# Altium PCB T-Display SF32 V0.6(1).PcbDoc (part 1 of 2)
Units mil, origin at the board's own origin, x right, y up, seen from the top; angles counter-clockwise.
Board outline 1672.83 x 1680.71 mil, 4 copper layers (Top, GND, POWER, Bottom), stack 35.4 mil thick; 133 components, 115 nets, 507 pads, 349 vias.
Unrouted connection lines stored in the file: 310.
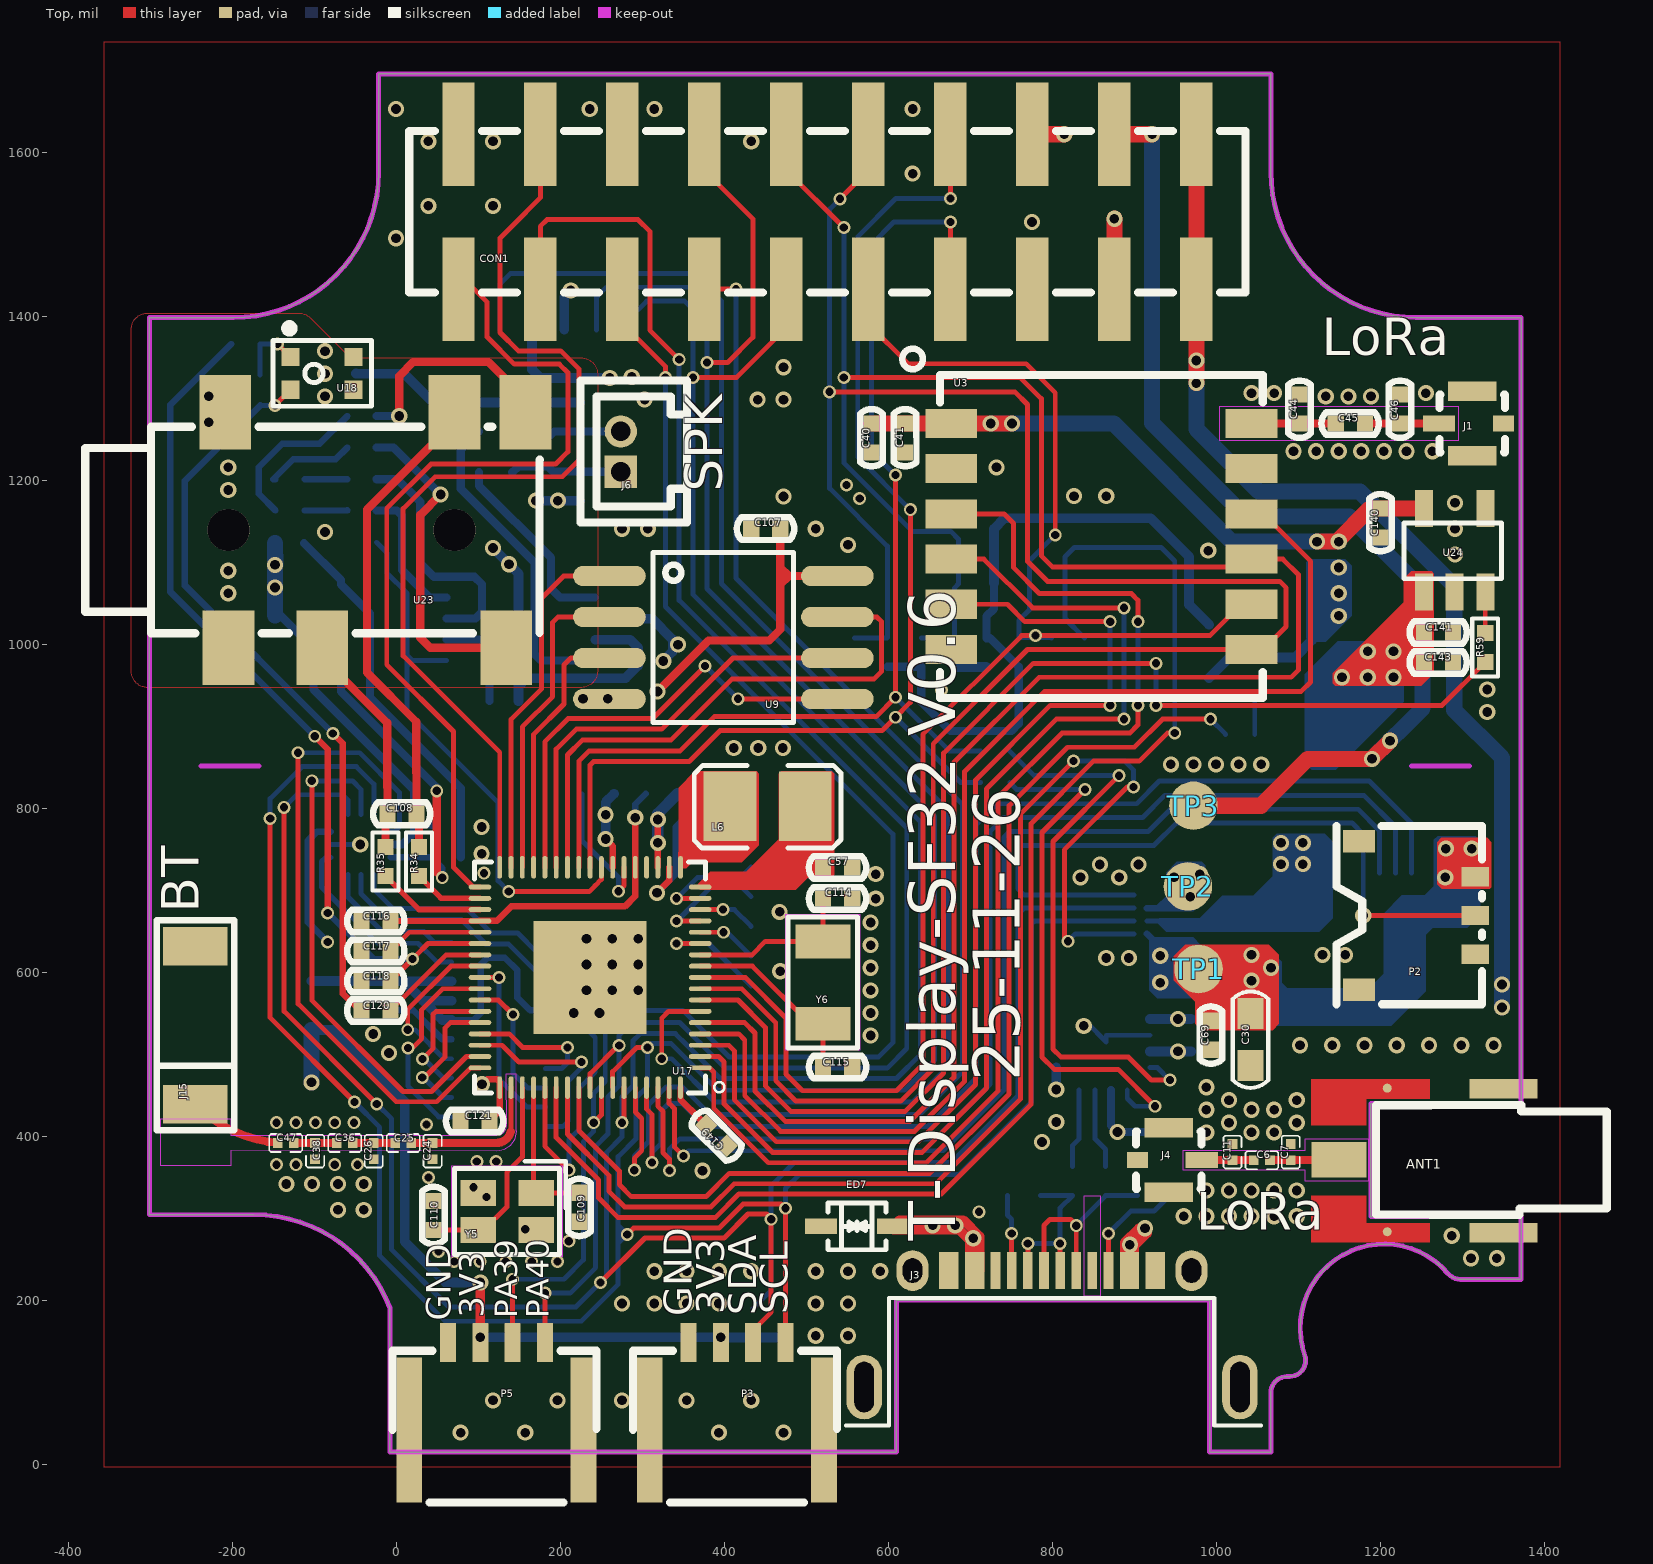
[diagram p0: Top view]
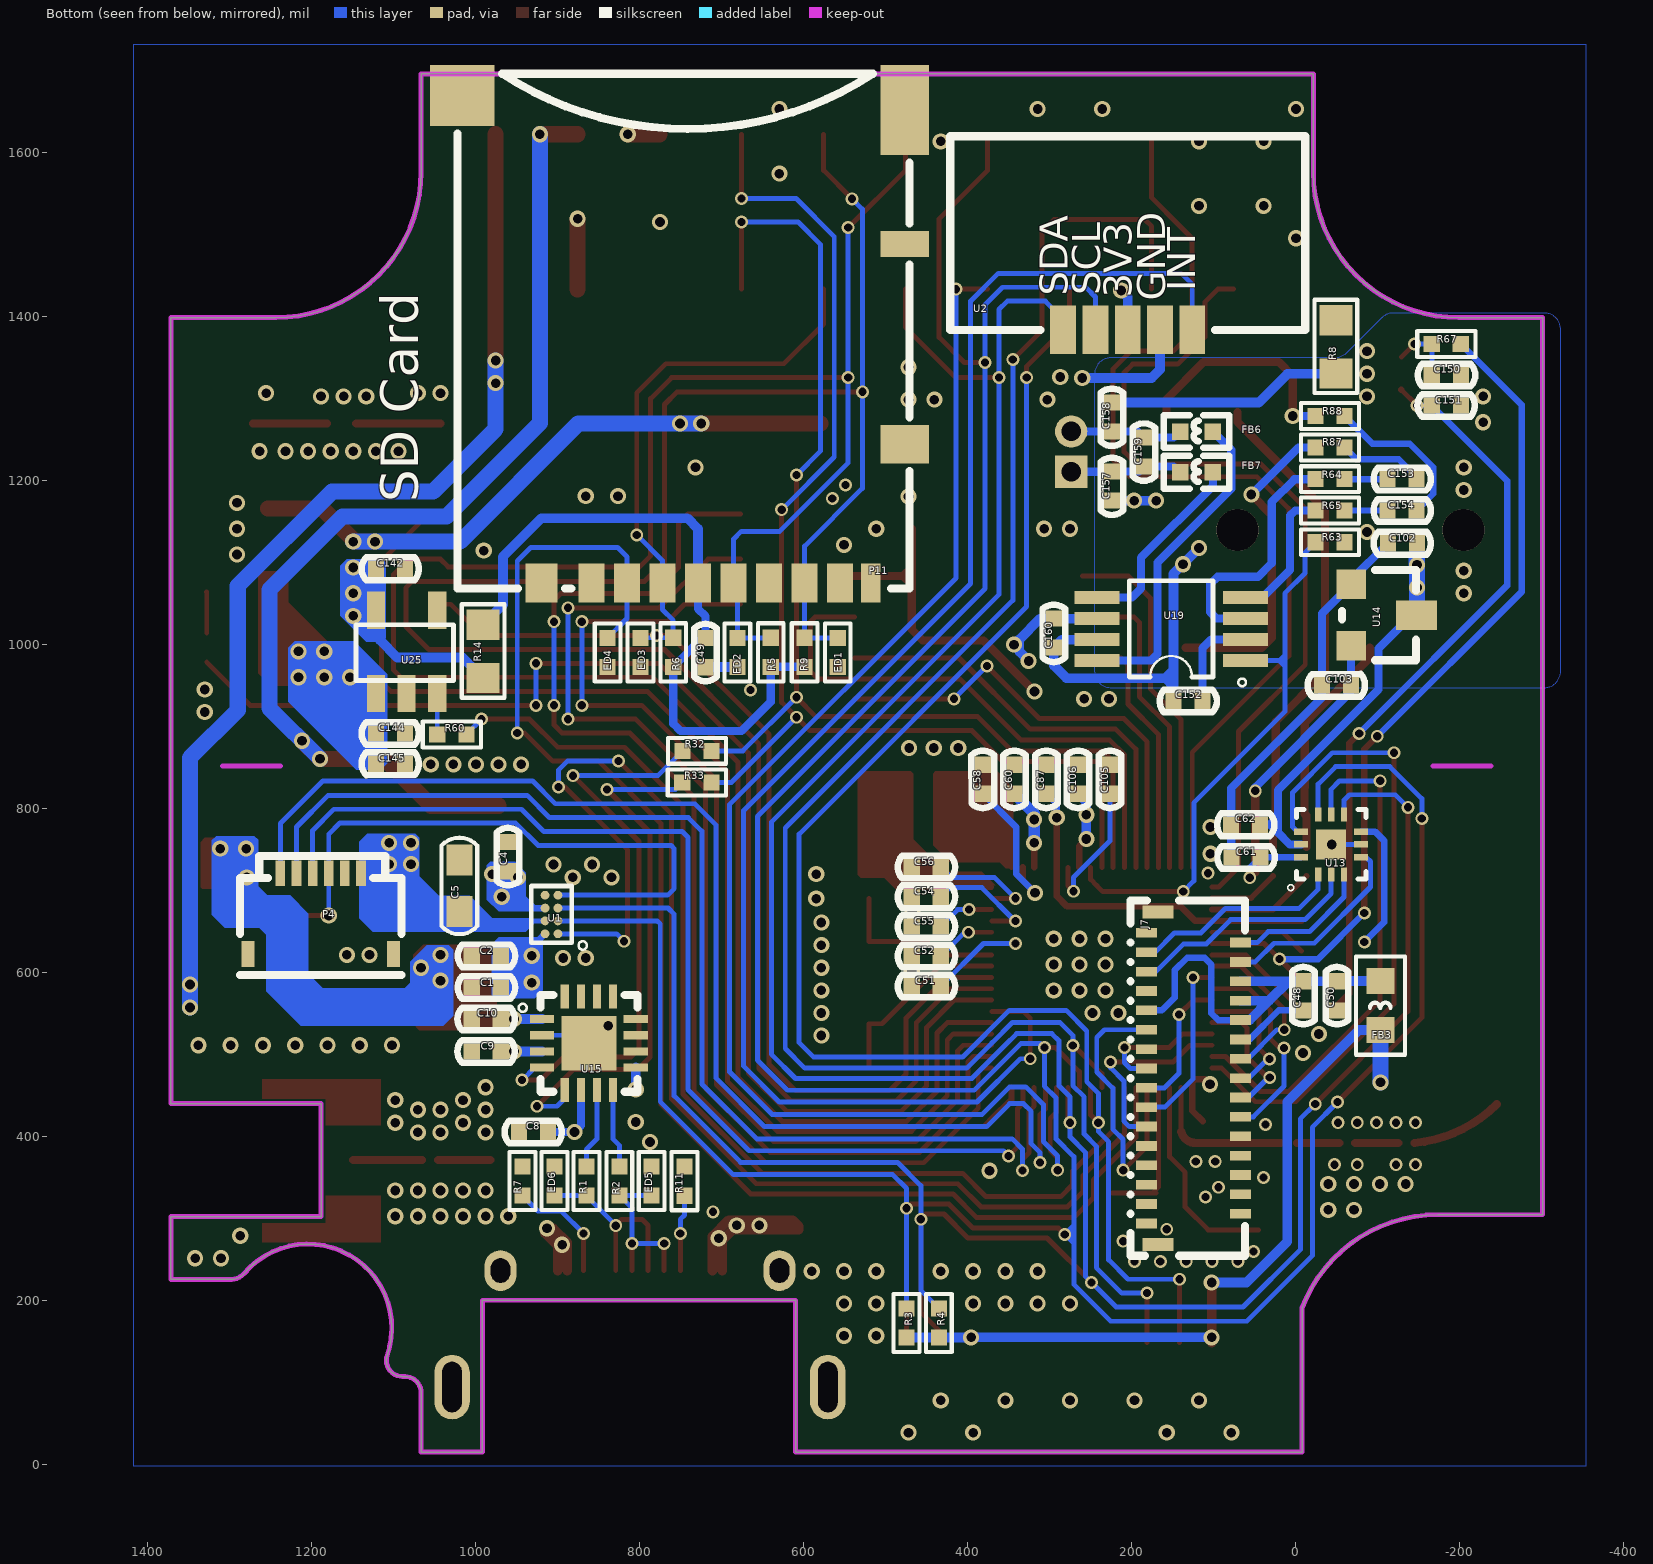
[diagram p1: Bottom view, seen from below]
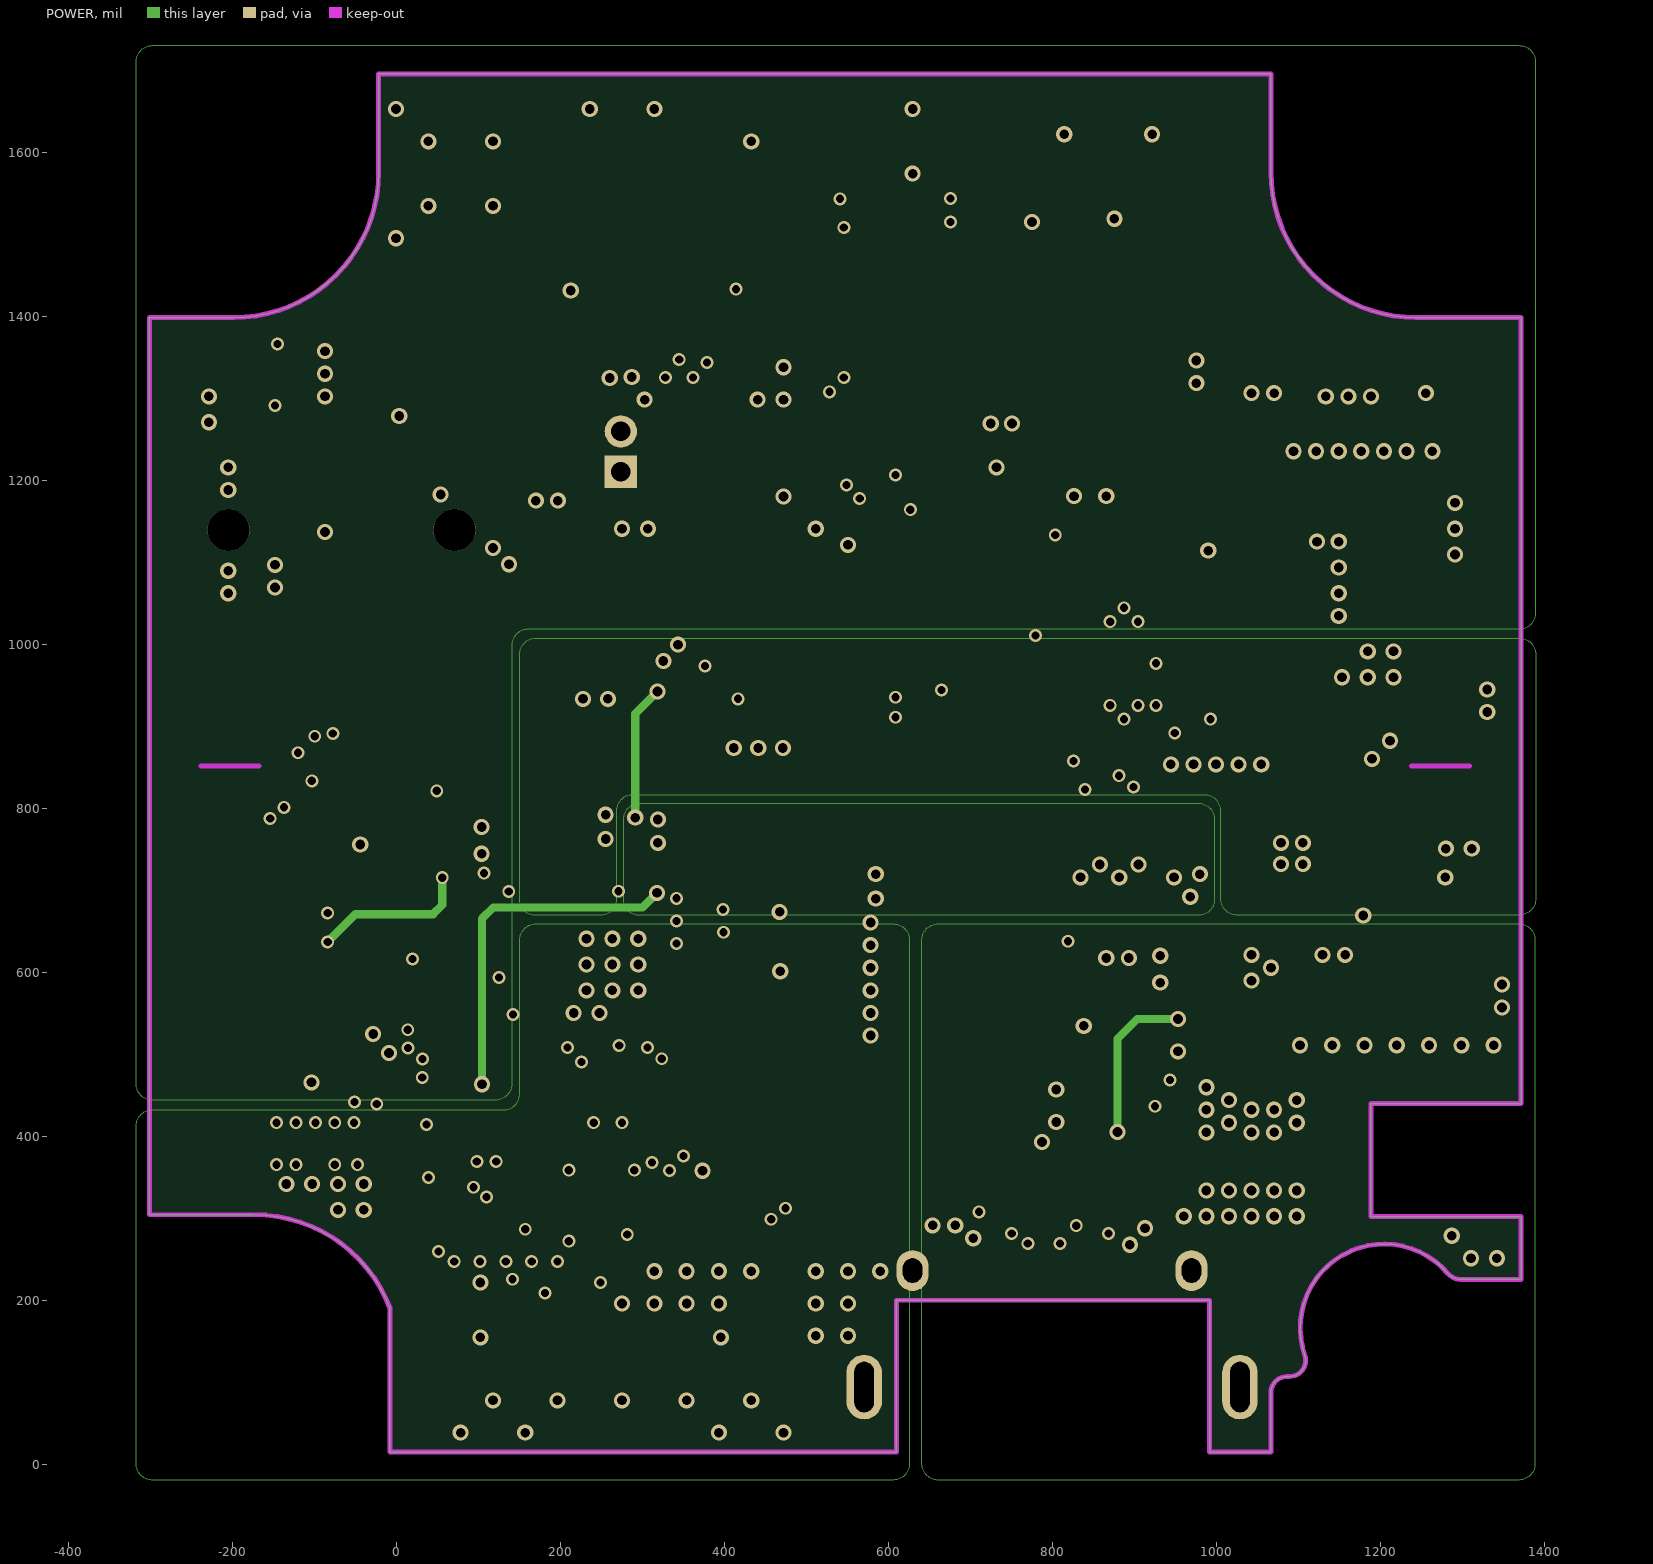
[diagram p2: POWER]

## Layer stack, top to bottom
Solder Mask Top: solder mask 0.4, Solder Resist, Dk 3.5
Top: signal copper 1.35
Dielectric 1: dielectric 10, FR-4, Dk 4.3
GND: signal copper 1.35
Dielectric2: dielectric 10, FR-4, Dk 4.3
POWER: signal copper 1.35
Dielectric3: dielectric 10, FR-4, Dk 4.3
Bottom: signal copper 1.35
Solder Mask Bottom: solder mask 0.4, Solder Resist, Dk 3.5

## Board outline
1372.05,302.91 1372.05,226.34 1298.02,226.34 cw(c1298.02,246.02) 1283.02,233.28 1282.96,233.34 ccw(c1205.01,167) 1108.17,133.82 cw(c1089.55,127.45) 1089.55,107.76 1086.61,107.76 ccw(c1086.61,88.08) 1066.93,88.08 1066.93,15.71 992.13,15.71 992.13,200.75 610.24,200.75 610.24,15.71 -7.48,15.71 -7.48,191.52 -7.44,191.41 ccw(c-172.83,127.91) -172.83,305.08 -300.79,305.08 -300.79,1399.17 -198.43,1399.17 ccw(c-198.43,1576.34) -21.26,1576.34 -21.26,1696.42 1066.93,1696.42 1066.93,1576.34 ccw(c1244.09,1576.34) 1244.09,1399.17 1372.05,1399.17 1372.05,440.71 1188.98,440.71 1188.98,302.91

## Design rules (kind name [scope] priority, off if disabled: settings)
Clearance "Clearance - Default - DEFAULT- SMD" [IsVia vs IsSMTPin] p1: gap=6 ignorepadtopadclearanceinfootprint=FALSE
Clearance "Clearance - Default - DEFAULT - Via" [IsVia vs IsVia] p2: gap=6 ignorepadtopadclearanceinfootprint=FALSE
Clearance "Clearance - Default - DEFAULT - Net" [All] p3: gap=6 ignorepadtopadclearanceinfootprint=FALSE except(0: Arc-Hole Track-Hole SMDPad-Hole THPad-Hole Via-Hole Fill-Hole Poly-Hole Region-Hole Text-Hole; 10: Arc-Fill Arc-Poly Arc-Region Track-Fill Track-Poly Track-Region SMDPad-Fill SMDPad-Poly SMDPad-Region THPad-Fill THPad-Poly THPad-Region Via-Fill Via-Poly Via-Region Fill-Fill Fill-Poly Fill-Region Poly-Poly Poly-Region Region-Region Text-Text)
ComponentClearance "ComponentClearance - Default - DEFAULT" [All] p1: gap=6 collisioncheckmode=3 verticalgap=10 showdistances=FALSE
FanoutControl Fanout_Small [(CompPinCount < 5)] p3: bgadir=Out bgaviamode=Centered fanoutstyle=Auto fanoutdirection=OutThenIn viagrid=1 // Fanout_Small (Default Rule)
FanoutControl Fanout_SOIC [IsSOIC] p4: bgadir=Out bgaviamode=Centered fanoutstyle=Auto fanoutdirection=Alternating viagrid=1 // Fanout_SOIC (Default Rule)
HoleToHoleClearance "HoleToHoleClearance - Default - DEFAULT" [All] p1: gap=6 allowstackedmicrovias=TRUE
Length "Default Length" [All] p1: maxlimit=50000 minlimit=0
MaxMinImpedance "Default Impedance" [All] p1: minimum=50.00 maximum=150.0
ParallelSegment "Default Parallel Segment Adjasent" [All] p1: limit=1000 gap=200
ParallelSegment "Default Parallel Segment Same Layer" [All] p2: limit=1000 gap=200
PlaneConnect "Default PlaneConnect" [All] p1: planeconnectstyle=Direct reliefexpansion=20 reliefentries=4 reliefconductorwidth=15 reliefairgap=10
PolygonConnect "PolygonConnect - Default SMT" [IsSMTPin] p1: connectstyle=Direct reliefconductorwidth=10 reliefentries=4 polygonreliefangle="45 Angle" airgapwidth=10
PolygonConnect "PolygonConnect - Default Pad" [All] p2: connectstyle=Direct reliefconductorwidth=15 reliefentries=4 polygonreliefangle="45 Angle" airgapwidth=10
RoutingLayers "RoutingLayers - Default - DEFAULT" [All] p1: top layer_v5=TRUE mid layer 1_v5=TRUE mid layer 2_v5=TRUE bottom layer_v5=TRUE
RoutingPriority "RoutingPriority - Default - DEFAULT" [All] p1: routingpriority=3
RoutingTopology "Default Routing Topology" [All] p1: topology=Shortest
RoutingVias "RoutingVias - Default - DEFAULT" [All] p1: holewidth=11.81 width=19.68 viastyle="Through Hole" minholewidth=11.81 minwidth=19.68 maxholewidth=11.81 maxwidth=19.68
SMDToCorner "SMDToCorner - Default - DEFAULT" [All] p1: distance=60000
SolderMaskExpansion [All] p1: expansion=4 istentingtop=FALSE
Width "Default Width" [All] p1: maxlimit=118.11 minlimit=6 preferedwidth=6
20 further rules are at their usual default settings.

## Components (designator, comment, footprint, x,y, rotation, side; value= is the part's Value field where it differs from the comment)
ANT1 "SMA-SMD_BWMMCX-JEF" SMA-SMD_BWMMCX-JEF 1250.15,371.41 r180 top
C1 "C0402" C0402 987.4,582.28 r180 bottom
C2 "C0402" C0402 987.4,620.87 r180 bottom
C4 "C0402" C0402 961.02,741.73 r90 bottom
C5 "C0603" C0603 1020.47,706.69 r90 bottom
C6 "C0201" C0201 1055.91,371.65 r0 top
C7 "C0201" C0201 1090.94,381.5 r270 top
C8 "C0402" C0402 929.92,405.91 r0 bottom
C9 "C0402" C0402 987.4,504.33 r0 bottom
C10 "C0402" C0402 987.4,543.7 r0 bottom
C11 "C0201" C0201 1020.08,381.5 r270 top
C24 "C0201" C0201 44.49,382.68 r90 top
C25 "C0201" C0201 8.66,392.52 r0 top
C26 "C0201" C0201 -27.17,382.68 r90 top
C30 "C0603" C0603 1041.73,519.29 r90 top
C36 "C0201" C0201 -62.6,392.52 r0 top
C38 "C0201" C0201 -98.82,382.68 r270 top
C40 "C0402" C0402 579.92,1252.36 r90 top
C41 "C0402" C0402 620.87,1252.36 r90 top
C44 "C0402" C0402 1101.97,1287.8 r270 top
C45 "C0402" C0402 1163.78,1270.08 r180 top
C46 "C0402" C0402 1224.41,1287.8 r270 top
C47 "C0201" C0201 -134.65,392.52 r0 top
C48 "C0402" C0402 -9.06,572.05 r90 bottom
C49 "C0402" C0402 720.08,990.55 r90 bottom
C50 "C0402" C0402 -50,572.05 r90 bottom
C51 "C0402" C0402 450.79,583.86 r180 bottom
C52 "C0402" C0402 450.79,620.47 r180 bottom
C54 "C0402" C0402 450.79,692.91 r180 bottom
C55 "C0402" C0402 450.79,656.69 r180 bottom
C56 "C0402" C0402 450.79,729.13 r180 bottom
C57 "C0402" C0402 538.58,728.35 r180 top
C58 "C0402" C0402 381.89,836.22 r270 bottom
C60 "C0402" C0402 343.31,836.22 r270 bottom
C61 "C0402" C0402 61.02,740.94 r180 bottom
C62 "C0402" C0402 61.42,780.71 r180 bottom
C69 "C0402" C0402 993.7,524.02 r90 top
C87 "C0402" C0402 304.33,836.22 r270 bottom
C102 "C0402" C0402 -129.92,1124.02 r0 bottom
C103 "C0402" C0402 -49.61,950.79 r0 bottom
C105 "C0402" C0402 226.77,836.22 r270 bottom
C106 "C0402" C0402 265.75,836.22 r270 bottom
C107 "C0402" C0402 450.79,1141.73 r180 top
C108 "C0402" C0402 7.09,794.09 r180 top
C109 "C0402" C0402 223.62,314.17 r270 top
C110 "C0402" C0402 45.67,304.33 r270 top
C114 "C0402" C0402 538.58,690.55 r180 top
C115 "C0402" C0402 538.58,485.04 r180 top
C116 "C0402" C0402 -24.41,663.39 r180 top
C117 "C0402" C0402 -24.41,626.77 r180 top
C118 "C0402" C0402 -24.41,590.16 r180 top
C120 "C0402" C0402 -24.41,554.33 r180 top
C121 "C0402" C0402 96.06,419.29 r180 top
C140 "C0402" C0402 1200.39,1148.82 r90 top
C141 "C0402" C0402 1271.26,1015.35 r180 top
C142 "C0402" C0402 1104.33,1092.91 r0 bottom
C143 "C0402" C0402 1271.26,978.74 r180 top
C144 "C0402" C0402 1104.33,892.13 r0 bottom
C145 "C0402" C0402 1104.33,855.12 r0 bottom
C149 "C0402" C0402 390.94,401.57 r135 top
C150 "C0402" C0402 -183.46,1329.13 r180 bottom
C151 "C0402" C0402 -183.46,1292.13 r0 bottom
C152 "C0402" C0402 131.5,931.5 r180 bottom
C153 "C0402" C0402 -129.33,1202.17 r180 bottom
C154 "C0402" C0402 -129.33,1163.98 r180 bottom
C157 "C0402" C0402 224.41,1193.7 r270 bottom
C158 "C0402" C0402 224.41,1277.95 r270 bottom
C159 "C0402" C0402 185.43,1235.43 r270 bottom
C160 "C0402" C0402 295.28,1014.37 r270 bottom
CON1 "HDR-SMD_20P-P2.54-V-F-R2-C10-S2.54-LS7.1" HDR-SMD_20P-P2.54-V-F-R2-C10-S2.54-LS7.1 525.98,1528.35 r180 top
ED1 "R0402" R0402 559.06,990.94 r270 bottom
ED2 "R0402" R0402 681.5,990.94 r270 bottom
ED3 "R0402" R0402 799.61,990.94 r270 bottom
ED4 "R0402" R0402 839.76,990.94 r270 bottom
ED5 "R0402" R0402 785.43,346.06 r90 bottom
ED6 "R0402" R0402 903.94,346.06 r90 bottom
ED7 "SOD-323_L1.8-W1.3-LS2.5-BI" SOD-323_L1.8-W1.3-LS2.5-BI 562.2,290.94 r180 top
FB3 "FB0603" FB0603 -103.15,560.24 r90 bottom
FB6 "FB0402" FB0402 121.26,1260.24 r0 bottom
FB7 "FB0402" FB0402 121.26,1210.63 r0 bottom
J1 "IPEX-SMD_4P-L1.7-W1.7-LS2.0-L" IPEX-SMD_4P-L1.7-W1.7-LS2.0-L 1311.42,1270.08 r0 top
J3 "TYPE-C-MK-TCF" TYPE-C-MK-TCF 629.92,237.01 r0 top
J4 "IPEX-SMD_4P-L1.7-W1.7-LS2.0-L" IPEX-SMD_4P-L1.7-W1.7-LS2.0-L 943.31,371.65 r180 top
J6 "CONN-TH_2P-P1.25_MEGASTAR_ZX-MX1.25-2PZZ" CONN-TH_2P-P1.25_MEGASTAR_ZX-MX1.25-2PZZ 274.02,1235.83 r90 top
J7 "FPC-SMD_P0.30-31P_FGS-XJ-H1.0" FPC-SMD_P0.30-31P_FGS-XJ-H1.0 124.8,471.65 r270 bottom
J15 "CA-C03" CA-C03 -244.88,439.76 r90 top
L6 "L1008" L1008 453.15,803.15 r180 top
P2 "CONN-SMD_3P-P1.20_HCTL_HC-1.2-3PWT" CONN-SMD_3P-P1.20_HCTL_HC-1.2-3PWT 1245.28,670.08 r270 top
P3 "CONN-SMD_4P-P1.00_XUNPU_WAFER-100W-4P" CONN-SMD_4P-P1.00_XUNPU_WAFER-100W-4P 415.75,72.44 r0 top
P4 "FPC-SMD_6P-P0.50_HC-FPC-05-09-6RLTAG" FPC-SMD_6P-P0.50_HC-FPC-05-09-6RLTAG 1189.37,672.44 r0 bottom
P5 "CONN-SMD_4P-P1.00_XUNPU_WAFER-100W-4P" CONN-SMD_4P-P1.00_XUNPU_WAFER-100W-4P 122.44,72.44 r0 top
P11 "TF-SMD_TF-111" TF-SMD_TF-111 746.85,1372.83 r0 bottom
R1 "R0402" R0402 864.96,346.06 r90 bottom
R2 "R0402" R0402 824.8,346.06 r90 bottom
R3 "R0402" R0402 475.2,173.23 r270 bottom
R4 "R0402" R0402 435.83,173.23 r270 bottom
R5 "R0402" R0402 640.16,990.94 r90 bottom
R6 "R0402" R0402 759.06,990.94 r90 bottom
R7 "R0402" R0402 942.91,346.06 r90 bottom
R8 "R0603" R0603 -48.87,1363.54 r90 bottom
R9 "R0402" R0402 598.82,990.94 r90 bottom
R11 "R0402" R0402 746.06,346.06 r270 bottom
R14 "R0603" R0603 991.34,992.13 r90 bottom
R32 "R0402" R0402 730.32,870.47 r180 bottom
R33 "R0402" R0402 730.71,831.89 r180 bottom
R34 "R0402" R0402 28.35,735.83 r90 top
R35 "R0402" R0402 -12.6,735.83 r90 top
R59 "R0402" R0402 1327.95,996.85 r270 top
R60 "R0402" R0402 1029.53,890.55 r180 bottom
R63 "R0402" R0402 -41.73,1125.59 r0 bottom
R64 "R0402" R0402 -41.73,1202.56 r0 bottom
R65 "R0402" R0402 -41.73,1164.37 r0 bottom
R67 "R0402" R0402 -183.46,1367.32 r0 bottom
R87 "R0402" R0402 -41.73,1241.14 r0 bottom
R88 "R0402" R0402 -41.73,1279.53 r0 bottom
TP1 "TEST2" TEST2 978.74,604.72 r0 top
TP2 "TEST2" TEST2 965.75,705.51 r0 top
TP3 "TEST2" TEST2 972.44,803.94 r0 top
U1 "DSBGA-8_L1.6-W1.1-P0.40_LMH2191TMX" DSBGA-8_L1.6-W1.1-P0.40_LMH2191TMX 907.87,671.26 r90 bottom
U2 "HDR1X5" HDR1X5 205.12,1384.25 r90 bottom
U3 "HPD16B3" HPD16B3 677.17,1270.08 r0 top
U9 "SOIC-8_L5.3-W5.3-P1.27-LS8.0-BL" SOIC-8_L5.3-W5.3-P1.27-LS8.0-BL 399.21,1009.06 r270 top
U13 "QFN-12_L2.0-W2.0-P0.50-BL-EP" QFN-12_L2.0-W2.0-P0.50-BL-EP -42.91,756.69 r180 bottom
U14 "SOT23" SOT23 -106.3,1036.22 r270 bottom
U15 "TQFN-16_L3.0-W3.0-P0.50-BL-EP1.7" TQFN-16_L3.0-W3.0-P0.50-BL-EP1.7 862.2,514.17 r270 bottom
U17 "QFN-68_L7.0-W7.0-P0.35-TL-EP5.2" QFN-68_L7.0-W7.0-P0.35-TL-EP5.2 236.61,594.49 r180 top
U18 "MIC-SMD_4P-L2.8-W1.9_S15OT421-005" MIC-SMD_4P-L2.8-W1.9_S15OT421-005 -90.16,1331.1 r270 top
U19 "MSOP-8_L3.0-W3.0-P0.65-LS4.9-BL" MSOP-8_L3.0-W3.0-P0.65-LS4.9-BL 152.17,1019.29 r90 bottom
U23 "AUDIO-SMD_PJ-342" AUDIO-SMD_PJ-342 -25.2,1140.16 r90 top
U24 "SOT23-5" SOT23-5 1347.64,1041.34 r90 top
U25 "SOT23-5" SOT23-5 1027.95,917.32 r90 bottom
Y5 "CRYSTAL-SMD_4P-L2.0-W1.6-BL" CRYSTAL-SMD_4P-L2.0-W1.6-BL 135.43,309.06 r180 top
Y6 "CRYSTAL-SMD_L3.2-W1.5-1" CRYSTAL-SMD_L3.2-W1.5-1 520.47,588.19 r270 top

## Footprints (in the part's own frame and the unit in brackets; to place one, negate y for a bottom-side part, rotate by r counter-clockwise, add the part's x,y. Pads: shape width x height; smd on the part's side, far side on the other; paste and mask are expansions set on the pad)
AUDIO-SMD_PJ-342 [mm]
  round 1.3 hole 1.3 unplated: 1(0,4.55) 8(0,-2.45)
  rect 2.3x1.6 smd: 2(-3.65,4.55) 3(3.65,4.65) 4(-3.65,1.65) 5(3.65,-2.45) 6(-3.65,-4.05) 7(3.65,-4.65)
  silkscreen extent -3.2,-5.1 3.2,8.99
C0201 [mm]
  rect 0.3x0.3 smd mask+0.03: 1(-0.25,0) 2(0.25,0)
  silkscreen extent -0.51,-0.28 0.51,0.28
C0402 [mm]
  rect 0.5x0.5 smd: 1(-0.45,0) 2(0.45,0)
  silkscreen extent -0.88,-0.35 0.89,0.35
C0603 [mm]
  rect 0.96x0.8 smd: 1(-0.812,-0.009) 2(0.788,-0.009)
  silkscreen extent -1.51,-0.56 1.48,0.54
CA-C03 [mm]
  rect 1.2x2 smd: 1(0,0) 2(4.9,0)
  silkscreen extent -0.8,-1.2 5.7,1.2
CONN-SMD_3P-P1.20_HCTL_HC-1.2-3PWT [mm]
  rect 0.6x0.85 smd mask+0.05: 1(-1.2,1.8) 2(0,1.8) 3(1.2,1.8)
  rect 0.7x1 smd mask+0.05: 4(2.3,-1.8) 5(-2.3,-1.8)
  silkscreen extent -2.77,-2.5 2.75,2
CONN-SMD_4P-P1.00_XUNPU_WAFER-100W-4P [mm]
  rect 0.5x1.2 smd: 1(-1.5,1.95) 2(-0.5,1.95) 3(0.5,1.95) 4(1.5,1.95)
  rect 0.8x4.5 smd: 5(2.7,-0.76) 6(-2.7,-0.76)
  silkscreen extent -3.22,-3 3.1,1.7
CONN-TH_2P-P1.25_MEGASTAR_ZX-MX1.25-2PZZ [mm]
  rrect0% 1x1 hole 0.6 mask+0.051: 1(-0.625,0)
  rrect100% 1x1 hole 0.6 mask+0.051: 2(0.625,0)
  silkscreen extent -2.2,-2.05 2.2,1.25
CRYSTAL-SMD_4P-L2.0-W1.6-BL [mm]
  rect 1.1x0.8 smd: 1(-0.9,-0.575) 2(0.9,-0.575) 3(0.9,0.575) 4(-0.9,0.575)
  silkscreen extent -1.82,-1.56 1.64,1.33
CRYSTAL-SMD_L3.2-W1.5-1 [mm]
  rect 1.05x1.7 smd mask+0.051: 1(-1.275,0) 2(1.275,0)
  silkscreen extent -2.03,-1.08 2.03,1.08
DSBGA-8_L1.6-W1.1-P0.40_LMH2191TMX [mm]
  round 0.27 smd mask+0.051: A1(-0.6,-0.2) A2(-0.6,0.2) B1(-0.2,-0.2) B2(-0.2,0.2) C1(0.2,-0.2) C2(0.2,0.2) D1(0.6,-0.2) D2(0.6,0.2)
  silkscreen extent -1.09,-1.1 0.88,0.63
FB0402 [mil]
  rect 20x20 smd: 1(-20,0) 2(20,0)
  silkscreen extent -40,-20 40,20
FB0603 [mil]
  rect 32x34 smd: 1(-30,0) 2(30,0)
  silkscreen extent -60,-30 60,30
FPC-SMD_6P-P0.50_HC-FPC-05-09-6RLTAG [mm]
  rect 0.3x0.8 smd mask+0.05: 1(1.25,-1.25) 2(0.75,-1.25) 3(0.25,-1.25) 4(-0.25,-1.25) 5(-0.75,-1.25) 6(-1.25,-1.25)
  rect 0.4x0.8 smd mask+0.05: 7(-2.25,1.25) 8(2.25,1.25)
  silkscreen extent -2.5,-1.78 2.5,1.91
FPC-SMD_P0.30-31P_FGS-XJ-H1.0 [mm]
  rect 0.3x0.65 smd mask+0.051: 1(-4.5,-1.453) 2(-4.2,1.453) 3(-3.9,-1.453) 4(-3.6,1.453) 5(-3.3,-1.453) 6(-3,1.453) 7(-2.7,-1.453) 8(-2.4,1.453) 9(-2.1,-1.453) 10(-1.8,1.453) 11(-1.5,-1.453) 12(-1.2,1.453) 13(-0.9,-1.453) 14(-0.6,1.453) 15(-0.3,-1.453) 16(0,1.453) 17(0.3,-1.453) 18(0.6,1.453) 19(0.9,-1.453) 20(1.2,1.453) 21(1.5,-1.453) 22(1.8,1.453) 23(2.1,-1.453) 24(2.4,1.453) 25(2.7,-1.453) 26(3,1.453) 27(3.3,-1.453) 28(3.6,1.453) 29(3.9,-1.453) 30(4.2,1.453) 31(4.5,-1.453)
  rect 0.4x0.95 smd mask+0.051: 32(-5.15,-1.103) 33(5.15,-1.103)
  silkscreen extent -5.5,-1.95 5.5,1.6
HDR1X5 [mm]
  rect 1.5x0.8 smd: 1(0,2) 2(0,1) 3(0,0) 4(0,-1) 5(0,-2)
  silkscreen extent 0,-5.5 6,5.5
HDR-SMD_20P-P2.54-V-F-R2-C10-S2.54-LS7.1 [mm]
  rect 1x3.2 smd mask+0.051: 1(-11.43,-2.4) 2(-11.43,2.4) 3(-8.89,-2.4) 4(-8.89,2.4) 5(-6.35,-2.4) 6(-6.35,2.4) 7(-3.81,-2.4) 8(-3.81,2.4) 9(-1.27,-2.4) 10(-1.27,2.4) 11(1.27,-2.4) 12(1.27,2.4) 13(3.81,-2.4) 14(3.81,2.4) 15(6.35,-2.4) 16(6.35,2.4) 17(8.89,-2.4) 18(8.89,2.4) 19(11.43,-2.4) 20(11.43,2.4)
  silkscreen extent -12.95,-2.5 12.95,2.5
HPD16B3 [mm]
  rect 1.6x0.9 smd: 1(0,0) 2(0,-1.4) 3(0,-2.8) 4(0,-4.2) 5(0,-5.6) 6(0,-7) 7(9.3,-7) 8(9.3,-5.6) 9(9.3,-4.2) 10(9.3,-2.8) 11(9.3,-1.4) 12(9.3,0)
  silkscreen extent -1.52,-8.5 9.65,2.32
IPEX-SMD_4P-L1.7-W1.7-LS2.0-L [mm]
  rect 1x0.5 smd: 1(-1,0)
  rect 1.5x0.6 smd: 2(0.025,-1) 4(0.025,1)
  rect 0.65x0.5 smd: 3(1,0)
  silkscreen extent -0.99,-0.89 1.04,0.89
L1008 [mm]
  rect 1.635x2.16 smd paste-1.067 mask+0.051: 1(-1.168,0) 2(1.168,0)
  silkscreen extent -2.27,-1.27 2.27,1.3
MIC-SMD_4P-L2.8-W1.9_S15OT421-005 [mm]
  rect 0.56x0.56 smd: 1(-0.505,-0.975) 2(-0.505,0.975) 3(0.505,0.975) 4(0.505,-0.975)
  silkscreen extent -1.52,-1.52 1.02,1.52
MSOP-8_L3.0-W3.0-P0.65-LS4.9-BL [mm]
  rect 0.406x1.397 smd mask+0.051: 1(-0.975,-2.3) 2(-0.325,-2.3) 3(0.325,-2.3) 4(0.975,-2.3) 5(0.975,2.3) 6(0.325,2.3) 7(-0.325,2.3) 8(-0.975,2.3)
  silkscreen extent -1.77,-2.32 1.5,1.3
QFN-12_L2.0-W2.0-P0.50-BL-EP [mm]
  rect 0.2x0.44 smd: 1(-0.4,-0.929) 2(0,-0.929) 3(0.4,-0.929) 7(0.4,0.929) 8(0,0.929) 9(-0.4,0.929)
  rect 0.44x0.2 smd: 4(0.929,-0.4) 5(0.929,0) 6(0.929,0.4) 10(-0.929,0.4) 11(-0.929,0) 12(-0.929,-0.4)
  rect 0.92x0.92 smd: 13(0,0)
  silkscreen extent -1.34,-1.43 1.08,1.08
QFN-68_L7.0-W7.0-P0.35-TL-EP5.2 [mm]
  oval 0.7x0.15 smd paste-0.337 mask+0.05: 1(-3.411,2.8) 2(-3.411,2.45) 3(-3.411,2.1) 4(-3.411,1.75) 5(-3.411,1.4) 6(-3.411,1.05) 7(-3.411,0.7) 8(-3.411,0.35) 9(-3.411,0) 10(-3.411,-0.35) 11(-3.411,-0.7) 12(-3.411,-1.05) 13(-3.411,-1.4) 14(-3.411,-1.75) 15(-3.411,-2.1) 16(-3.411,-2.45) 17(-3.411,-2.8) 35(3.411,-2.8) 36(3.411,-2.45) 37(3.411,-2.1) 38(3.411,-1.75) 39(3.411,-1.4) 40(3.411,-1.05) 41(3.411,-0.7) 42(3.411,-0.35) 43(3.411,0) 44(3.411,0.35) 45(3.411,0.7) 46(3.411,1.05) 47(3.411,1.4) 48(3.411,1.75) 49(3.411,2.1) 50(3.411,2.45) 51(3.411,2.8)
  oval 0.15x0.7 smd paste-0.337 mask+0.05: 18(-2.8,-3.411) 19(-2.45,-3.411) 20(-2.1,-3.411) 21(-1.75,-3.411) 22(-1.4,-3.411) 23(-1.05,-3.411) 24(-0.7,-3.411) 25(-0.35,-3.411) 26(0,-3.411) 27(0.35,-3.411) 28(0.7,-3.411) 29(1.05,-3.411) 30(1.4,-3.411) 31(1.75,-3.411) 32(2.1,-3.411) 33(2.45,-3.411) 34(2.8,-3.411) 52(2.8,3.411) 53(2.45,3.411) 54(2.1,3.411) 55(1.75,3.411) 56(1.4,3.411) 57(1.05,3.411) 58(0.7,3.411) 59(0.35,3.411) 60(0,3.411) 61(-0.35,3.411) 62(-0.7,3.411) 63(-1.05,3.411) 64(-1.4,3.411) 65(-1.75,3.411) 66(-2.1,3.411) 67(-2.45,3.411) 68(-2.8,3.411)
  rect 3.5x3.5 smd paste-1.737 mask+0.05: 69(0,0)
  silkscreen extent -4.16,-3.58 3.58,3.58
R0402 [mm]
  rect 0.5x0.5 smd: 1(-0.448,0.008) 2(0.452,0.008)
  silkscreen extent -0.9,-0.39 0.9,0.41
R0603 [mil]
  rect 37x40 smd: 1(-32.5,0) 2(32.5,0)
  silkscreen extent -56,-26 58,26
SMA-SMD_BWMMCX-JEF [mm]
  round 0.28 smd: 1(1.05,2.212) 2(1.05,-2.237)
  rect 1.7x1.1 smd mask+0.05: 3(2.55,-0.012)
  rect 2.1x0.6 smd mask+0.05: 4(-2.55,-2.212) 5(-2.55,2.237)
  Top region: -0.27,-1.91 -0.27,-2.51 3.4,-2.51 3.4,-1.09 1.7,-1.09 1.7,-1.91 -0.27,-1.91
  Top region: -0.27,2.54 3.4,2.54 3.4,1.09 1.7,1.09 1.7,1.95 -0.27,1.95 -0.27,2.54
  silkscreen extent -5.75,-1.71 1.4,1.69
SOD-323_L1.8-W1.3-LS2.5-BI [mm]
  rect 0.985x0.49 smd mask+0.051: 1(-1.118,0) 2(1.118,0)
  silkscreen extent -0.9,-0.73 0.9,0.73
SOIC-8_L5.3-W5.3-P1.27-LS8.0-BL [mm]
  oval 0.63x2.25 smd mask+0.051: 1(-1.905,-3.53) 2(-0.635,-3.53) 3(0.635,-3.53) 4(1.905,-3.53) 5(1.905,3.53) 6(0.635,3.53) 7(-0.635,3.53) 8(-1.905,3.53)
  silkscreen extent -2.64,-2.18 2.64,2.18
SOT23 [mil]
  rect 36x36 smd: 1(-37.5,-39) 2(37.5,-39)
  rect 36x50 smd: 3(0,41)
  silkscreen extent -55,-50 55,40
SOT23-5 [mm]
  rect 1.15x0.56 smd: 1(0.59,2.389) 2(0.59,1.439) 3(0.59,0.489) 4(3.174,0.489) 5(3.174,2.389)
  silkscreen extent 1,-0.01 2.72,3
TEST2 [mm]
  round 1.5 smd: 1(0,0)
TF-SMD_TF-111 [mm]
  rect 0.8x1.2 smd: 1(1.75,7.55) 2(0.65,7.55) 3(-0.45,7.55) 4(-1.55,7.55) 5(-2.65,7.55) 6(-3.75,7.55) 7(-4.85,7.55) CD(2.85,7.55)
  rect 0.6x1.2 smd: 8(-5.8,7.55)
  rect 1.5x1.2 smd: 10(-6.85,3.25)
  rect 1.5x0.8 smd: 11(-6.85,-2.95)
  rect 1.5x2.8 smd: 12(-6.85,-7.1)
  rect 2x1.9 smd: 13(6.85,-7.55)
  rect 1x1.2 smd: 14(4.4,7.55)
  silkscreen extent -7,-8.23 7,7.72
TQFN-16_L3.0-W3.0-P0.50-BL-EP1.7 [mm]
  rect 0.25x0.75 smd paste-0.362 mask+0.051: 1(-0.748,-1.45) 2(-0.249,-1.45) 3(0.252,-1.45) 4(0.751,-1.45) 9(0.75,1.45) 10(0.25,1.45) 11(-0.25,1.45) 12(-0.749,1.45)
  rect 0.75x0.25 smd paste-0.362 mask+0.051: 5(1.45,-0.75) 6(1.45,-0.25) 7(1.45,0.25) 8(1.45,0.75) 13(-1.45,0.75) 14(-1.45,0.25) 15(-1.45,-0.25) 16(-1.45,-0.75)
  rect 1.7x1.7 smd paste-0.837 mask+0.051: 17(0,0)
  silkscreen extent -1.5,-2.17 1.5,1.5
TYPE-C-MK-TCF [mm]
  oval 1x1.26 hole 0.6 slot 0.76 at 90 deg: 1(0,0) 4(8.64,0)
  oval 1.1x2 hole 0.6 slot 1.56 at 90 deg: 2(-1.5,-3.61) 3(10.14,-3.61)
  rect 0.3x1.15 smd: A1(0.97,0) A4(1.77,0) A5(3.07,0) A6(4.07,0) A7(4.57,0) A8(5.57,0) A9(6.87,0) A12(7.67,0) B1(7.37,0) B4(6.57,0) B5(6.07,0) B6(5.07,0) B7(3.57,0) B8(2.57,0) B9(2.07,0) B12(1.27,0)
  silkscreen extent -2.06,-4.8 10.79,-0.85

## Via types
v1: diameter 19.68, hole 11.81, Top to Bottom, 234 vias
v2: diameter 15.75, hole 10, Top to Bottom, 115 vias

## Nets (pads, with @x,y where several pads share a name; then routed paths per layer and width w, separated by ;. In a path a pad name is that pad's centre, name@x,y a point inside that pad or via, vN(x,y) a via of type N, cw(c..) or ccw(c..) an arc to the next point about the centre after c; other vN are vias at no path point)
3V3_EN: R60.2 U17.59 | length 1339.2
  Top w6: U17.59@222.83,460.18 222.83,407.87 272.44,358.27 272.44,341.73 287.01,327.17 377.95,327.17 406.3,355.51 650.79,355.51 747.64,452.36 747.64,803.94 818.9,875.2 900.39,875.2 934.65,909.45 v2(993.31,909.45)
  Bottom w6: v2(993.31,909.45) 1011.75,891.01 R60.2@1011.75,890.88
32K_XI: C114.2 U17.11 Y6.1 | length 208.7
  Top w6: U17.11@370.92,622.05 434.25,622.05 450.39,638.39 Y6.1@520.47,638.39 520.47,690.21 C114.2@520.87,690.55
32K_XO: C115.2 U17.10 Y6.2 | length 231.7
  Top w6: U17.10@370.92,608.27 434.45,608.27 504.72,538 Y6.2@520.47,538 520.67,537.79 C115.2@520.87,485.04
48M_XI: C109.1 U17.55 Y5.1 | length 184.5
  Top w6: U17.55@167.71,460.18 167.71,338.58 Y5.1@174.6,331.7 ; Y5.1@170.86,331.7 Y5.1@174.6,331.7 ; C109.1@223.62,331.89 223.75,331.7 Y5.1@174.6,331.7
48M_XO: C110.2 U17.54 Y5.3 | length 254.5
  Top w6: C110.2@45.67,286.61 Y5.3@100,286.42 100.2,286.61 107.09,286.61 135.04,314.57 135.04,356.7 153.93,375.59 U17.54@153.93,460.18
$$$3779: R60.1 U25.3 | length 49.7
  Bottom w6: R60.1@1047.18,890.88 U25.3@1047.19,940.57
$$$6822: C8.1 C10.1 U15.1 U15.6 | length 334.5
  POWER w10: v1(879.92,405.91) 879.92,519.68 903.94,543.7 v1(953.54,543.7)
  Bottom w10: U15.6@872.04,457.09 872.04,413.78 v1(879.92,405.91) C8.1@912.2,405.91
  Bottom w11.81: U15.1@919.28,543.64 919.35,543.7 v1(953.54,543.7) C10.1@969.69,543.7
$$$6898: R32.1 U15.4 | length 701.7
  Top w6: v2(881.5,840.55) 801.18,760.24 801.18,507.09 811.02,497.24 893.31,497.24 921.26,469.29 v2(943.7,469.29)
  Bottom w6: R32.1@747.97,870.8 765.29,853.48 778.22,840.55 v2(881.5,840.55) ; U15.4@919.29,484.59 928.4,484.59 v2(943.7,469.29)
$$$6904: R33.1 U15.5 | length 654.2
  Top w6: v2(840.16,823.62) 787.8,771.26 787.8,497.24 802.76,482.28 880.71,482.28 v2(925.59,437.4)
  Bottom w6: R33.1@748.36,832.22 756.69,823.89 756.69,823.62 v2(840.16,823.62) ; U15.5@891.72,446.85 U15.5@891.72,457.09 ; U15.5@891.73,446.85 901.18,437.4 v2(925.59,437.4)
$$$11578: ANT1.3 C6.2 C7.2 | length 84.1
  Top w10: C6.2@1065.75,371.65 C7.2@1090.94,371.66 1091.19,371.9 ANT1.3@1149.77,371.9
$$$15490: C45.1 C46.2 J1.1 | length 90.6
  Top w10: C45.1@1181.5,1270.08 C46.2@1224.41,1270.08 J1.1@1272.05,1270.08
$$$15504: C6.1 C11.2 J4.1 | length 63.4
  Top w10: J4.1@982.68,371.65 C11.2@1020.08,371.66 C6.1@1046.06,371.65
$$$15941: C44.2 C45.2 U3.12 | length 102.8
  Top w10: U3.12@1043.31,1270.08 C44.2@1101.97,1270.08 C45.2@1146.06,1270.08
$$$16196: C51.2 U17.12 | length 141.3
  Top w6: v2(342.13,635.83) U17.12@370.92,635.83
  Bottom w6: v2(342.13,635.83) 381.04,635.83 C51.2@433.07,583.86
$$$16298: C52.2 U17.13 | length 74.2
  Top w6: U17.13@370.92,649.61 v2(399.21,649.61)
  Bottom w6: v2(399.21,649.61) 403.94,649.61 403.94,649.54 C52.2@433.07,620.47
$$$16317: C54.2 U17.14 | length 141.1
  Top w6: v2(342.13,663.39) U17.14@370.92,663.39
  Bottom w6: v2(342.13,663.39) 342.52,663.39 383.07,703.94 421.99,703.94 C54.2@433.07,692.91
$$$16342: C56.2 U17.16 | length 135.5
  Top w6: v2(342.13,690.94) U17.16@370.92,690.95
  Bottom w6: v2(342.13,690.94) 367.72,716.54 420.15,716.54 C56.2@433.07,729.13
$$$16343: C55.2 U17.15 | length 70.6
  Top w6: U17.15@370.92,677.17 v2(398.82,677.17)
  Bottom w6: v2(398.82,677.17) 412.54,677.17 C55.2@433.07,656.69
$$$16377: C57.2 L6.1 U17.17 | length 159.7
  Top w6: U17.17@370.92,704.73 427.17,704.73 442.94,720.5 450.39,727.95 520.41,727.95 520.71,728.21 C57.2@520.87,728.35
$$$16633: L6.2 U17.18 | length 101.5
  Top w6: U17.18@346.85,728.8 346.85,731.13 346.85,731.52 346.85,746.46 403.55,803.15 L6.2@407.18,803.15
$$$16831: C105.2 U17.23 | length 169.3
  Top w6: v2(271.26,699.61) 277.95,706.3 U17.23@277.95,728.8
  Bottom w6: C105.2@226.77,818.5 226.77,761.02 271.26,716.54 v2(271.26,699.61)
$$$17695: R87.2 U23.6 | length 397
  Top w10: v1(54.33,1183.46) 29.53,1158.66 29.53,1008.66 41.73,996.46 U23.6@134.25,996.46
  Bottom w7.87: R87.2@-23.95,1240.82 R87.2@-23.83,1240.94
  Bottom w10: R87.2@-23.83,1240.94 -3.15,1240.94 v1(54.33,1183.46)
$$$17704: R88.2 U23.7 | length 272.2
  Top w10: v1(3.94,1279.13) 3.94,1327.95 20.87,1344.88 112.6,1344.88 157.87,1299.61 U23.7@157.87,1283.86
  Bottom w10: R88.2@-23.95,1279.2 3.87,1279.2 v1(3.94,1279.13)
$$$18187: R35.1 U17.37 | length 132.3
  Top w7.09: R35.1@-12.92,718.17 27.95,677.29 27.95,677.17 U17.37@102.3,677.17
$$$18188: R34.1 U17.36 | length 85.9
  Top w7.09: R34.1@28.02,718.17 54.72,691.47 54.72,690.95 U17.36@102.3,690.95
$$$18409: C117.1 U17.39 | length 118.5
  Top w6: C117.1@-6.69,626.77 16.08,649.61 U17.39@102.3,649.61
$$$18474: C120.1 U17.41 | length 137.1
  Top w6: C120.1@-6.69,554.33 60.96,622.05 U17.41@102.3,622.05
$$$18957: C149.2 U17.68 | length 59.2
  Top w7.87: U17.68@346.85,460.18 346.85,445.48 369.39,422.94 378.19,414.15 C149.2@378.42,414.1
$$$21050: C150.1 R67.2 U18.1 | length 81.7
  Top w6: v2(-144.49,1366.93) U18.1@-128.54,1350.99
  Bottom w6: C150.1@-165.75,1329.13 -165.75,1366.94 R67.2@-165.69,1367 -144.56,1367 v2(-144.49,1366.93)
$$$21205: R59.1 U24.3 | length 50.1
  Top w6: R59.1@1328.28,1014.51 1328.28,1064.46 U24.3@1328.4,1064.58
$$$21679: C152.2 U19.2 | length 121.1
  Bottom w10: U19.2@61.61,1006.5 103.35,1006.5 113.78,996.06 C152.2@113.78,931.5
$$$21680: R65.2 U19.4 | length 168.5
  Bottom w10: R65.2@-23.95,1164.04 0.79,1164.04 7.09,1157.74 7.09,1091.34 40.55,1057.87 61.42,1057.87 U19.4@61.61,1057.68
$$$21681: R64.2 U19.3 | length 305.9
  Bottom w10: R64.2@-23.95,1202.23 -23.69,1201.97 1.97,1201.97 29.53,1174.41 29.53,1099.61 46.06,1083.07 95.67,1083.07 104.72,1074.02 104.72,1040.16 96.85,1032.28 86.42,1032.28 86.22,1032.09 U19.3@61.61,1032.09
$$$21682: C154.1 R65.1 | length 52.3
  Bottom w7.87: C154.1@-111.61,1163.98 -59.46,1163.98 R65.1@-59.39,1164.04
$$$21683: C153.1 R64.1 | length 52.3
  Bottom w7.87: C153.1@-111.61,1202.17 -59.46,1202.17 R64.1@-59.39,1202.23
$$$21684: C157.1 C159.2 FB7.2 J6.1 | length 138.5
  Bottom w10: FB7.2@141.26,1210.63 142.05,1210.63 149.13,1217.72 C159.2@185.43,1217.72 191.34,1211.42 C157.1@224.41,1211.42 224.6,1211.23 J6.1@274.01,1211.23
$$$21685: C158.2 C159.1 FB6.2 J6.2 | length 138.6
  Bottom w10: FB6.2@141.26,1260.24 142.13,1260.24 149.21,1253.15 C159.1@185.43,1253.15 192.91,1260.24 C158.2@224.41,1260.24 224.61,1260.43 J6.2@274.02,1260.43
$$$21686: FB6.1 U19.8 | length 395
  Bottom w10: FB6.1@101.26,1260.24 78.78,1237.76 78.78,1190.59 168.98,1100.39 168.98,988.98 176.85,981.1 242.52,981.1 U19.8@242.72,980.91
$$$21687: FB7.1 U19.5 | length 236.6
  Bottom w10: FB7.1@101.26,1210.63 101.26,1194.09 188.98,1106.38 188.98,1071.46 188.98,1068.7 200,1057.68 U19.5@242.72,1057.68
$$$22908: C25.1 C26.2 C36.2 | length 51.6
  Top w10: C36.2@-52.76,392.52 C26.2@-27.17,392.52 C25.1@-1.18,392.52
$$$23028: C36.1 C38.1 C47.2 | length 52.4
  Top w10: C47.2@-124.81,392.52 C38.1@-98.82,392.52 C36.1@-72.44,392.52
$$$23086: C47.1 J15.1 | length 113.2
  Top w10: J15.1@-244.88,439.76 ccw(c-129.07,555.58) C47.1@-144.49,392.52
AGND: C150.2 C151.1 C152.1 C157.2 C158.1 C160.2 R8.1 R63.1 U18.2 U18.3 U19.7 U23.2 U23.3 | length 790.3
  Bottom w11.81: R8.1@-48.87,1331.04 -48.54,1330.71 10.24,1330.71 45.28,1295.67 C158.1@224.41,1295.67 ; v1(118.11,1118.11) v1(137.8,1098.43) 149.21,1087.01 149.21,969.29 ; C152.1@149.21,931.5 149.21,949.61 ; v1(170.47,1175.98) v1(197.24,1175.98) C157.2@224.41,1175.98 ; U19.7@242.72,1006.5 285.43,1006.5 C160.2@295.28,996.65 295.28,974.8 279.92,959.45 159.06,959.45 ; 149.21,949.61 159.06,959.45 ; 149.21,949.61 149.21,969.29 ; 149.21,969.29 159.06,959.45
  other v1: -204.72,1062.99 -204.72,1090.55 -86.61,1137.8 -204.72,1188.98 -204.72,1216.54 -228.35,1271.65 -228.35,1303.15 -86.61,1303.15 -86.61,1330.71 -86.61,1358.27
BAT: C30.2 C69.2 P2.1 TP1.1
  other v1: 1043.31,590.55 1066.93,606.3 1043.31,622.05 1279.53,716.54 1280.32,751.57 1311.81,751.57
BAT_OUTSIDE: CON1.3 TP3.1 | length 1316.9
  Top w19.68: CON1.3@875.98,1622.84 v1(922.05,1622.83) ; TP3.1@972.44,803.94 1054.72,803.94 1111.81,861.02 v1(1190.16,861.02) v1(1212.2,883.07)
  Bottom w19.68: v1(922.05,1622.83) 922.05,1270.47 1035.83,1156.69 1162.6,1156.69 1251.97,1067.32 1251.97,922.83 v1(1190.16,861.02)
BT_ANT: C24.2 C25.2 U17.53 | length 181.8
  Top w6: 139.76,406.3 140.15,406.69 U17.53@140.15,460.18
  Top w10: C25.2@18.5,392.52 C24.2@44.49,392.52 122.05,392.52 ccw(c122.05,410.8) 139.76,406.3
CC1: J3.A5 R11.2 | length 93.4
  Top w6: J3.A5@750.79,237.01 v2(750.79,282.28)
  Bottom w6: R11.2@745.74,328.28 745.74,304.66 750.79,299.61 v2(750.79,282.28)
CC2: J3.B5 R7.1 | length 138.7
  Top w6: J3.B5@868.9,237.01 v2(868.9,282.28)
  Bottom w6: v2(868.9,282.28) 896.06,309.45 924.02,309.45 924.28,309.45 R7.1@943.24,328.41
D+: ED6.1 J3.A6 J3.B6 R1.1 | length 246.2
  Top w6: J3.A6@790.16,237.01 790.16,292.13 797.24,299.21 822.83,299.21 829.53,292.52 v2(829.53,291.73) J3.B6@829.53,237.01
  Bottom w6: v2(829.53,291.73) 829.92,292.13 829.92,293.04 R1.1@865.29,328.41 ED6.1@904.26,328.41
D-: ED5.1 J3.A7 J3.B7 R2.1 | length 209.7
  Top w6: J3.B7@770.47,237.01 v2(770.47,270.08) ; J3.A7@809.84,237.01 v2(809.84,270.08)
  Bottom w6: v2(770.47,270.08) v2(809.84,270.08) 809.84,313.39 810.11,313.39 R2.1@825.13,328.41 ED5.1@785.76,328.41
DACN: C108.1 R34.2 U23.5 | length 600.6
  Top w10: R34.2@28.02,753.6 28.02,790.55 C108.1@24.8,794.09 24.61,890.94 24.61,906.3 -35.43,966.34 -35.43,1165.35 71.26,1272.05 U23.5@71.26,1283.86
DACP: C108.2 R35.2 U23.4 | length 276.7
  Top w10: U23.4@-90.16,996.46 -90.16,984.45 -10.82,905.12 -10.82,854.92 C108.2@-10.63,794.09 -12.92,791.86 R35.2@-12.92,753.6
DM: R2.2 U15.8 | length 96.4
  Bottom w6: R2.2@825.13,363.84 825.13,389.76 832.68,397.24 U15.8@832.67,457.09
DP: R1.2 U15.7 | length 98.6
  Bottom w6: U15.7@852.35,457.09 852.36,397.57 865.29,384.65 R1.2@865.29,363.84
EAR_OUTN: C154.2 R88.1 | length 195
  Bottom w7.87: C154.2@-147.05,1163.98 -167.42,1184.35 -167.42,1216.63 -138.78,1245.28 -93.31,1245.28 R88.1@-59.39,1279.2
EAR_OUTP: C153.2 R87.1 | length 109.2
  Bottom w7.87: C153.2@-147.05,1202.17 -149.8,1202.17 -125.59,1226.38 -73.83,1226.38 R87.1@-59.39,1240.82
GND: ANT1.1 ANT1.2 ANT1.4 ANT1.5 C1.1 C2.1 C4.2 C5.2 C7.1 C8.2 C9.2 C10.2 C11.1 C24.1 C26.1 C30.1 C38.2 C40.1 C41.1 C44.1 C46.1 C48.1 C49.1 C50.1 C51.1 C52.1 C54.1 C55.1 C56.1 C57.1 C58.1 C60.1 C61.1 C62.1 C69.1 C87.1 C102.2 C103.2 C105.1 C106.1 C107.2 C109.2 C110.1 C114.1 C115.1 C116.2 C117.2 C118.2 C121.2 C140.1 C141.1 C142.1 C143.1 C144.1 C145.1 C149.1 CON1.6 CON1.15 CON1.19 ED1.2 ED2.2 ED3.2 ED4.2 ED5.2 ED6.2 ED7.2 J1.2 J1.3 J1.4 J3.1 J3.2 J3.3 J3.4 J3.A1 J3.A12 J3.B1 J3.B12 J4.2 J4.3 J4.4 J7.1 J7.7 J7.12 J7.22 J7.25 J7.28 J7.31 J7.32 J7.33 P2.3 P2.4 P2.5 P3.1 P3.5 P3.6 P4.5 P4.7 P4.8 P5.1 P5.5 P5.6 P11.6 P11.10 P11.11 P11.12 P11.13 R7.2 R8.2 R11.1 U1.D2 U2.4 U3.2 U3.11 U9.4 U13.5 U13.13 U14.1 U15.2 U15.17 U17.69 U24.2 U25.2 Y5.2 Y5.4 | length 875.9
  Bottom w6: U13.5@-79.5,756.69 v1(-43.7,756.69) ; C62.1@78.94,783.46 C62.1@79.13,780.71 ; v1(838.58,535.43) 846.46,535.43 862.2,519.68 866.14,515.75 866.14,523.96 U15.2@919.28,523.96
  Bottom w7.87: C48.1@-9.06,554.33 20.87,554.52 56.49,518.9 J7.12@67.6,518.9
  Bottom w10: C102.2@-112.2,1124.02 -67.3,1079.17 U14.1@-67.3,1073.72 -31.89,1038.31 C103.2@-31.89,950.79 -31.7,935.83 78.93,825.2 78.93,783.46 78.93,741.47 C61.1@78.74,740.94
  Bottom w11.81: U2.4@165.75,1384.25 165.75,1335.83 175.98,1325.59 v1(260.63,1325.59) ; ED2.2@681.17,973.17 719.75,973.17 C49.1@720.08,972.83
  other v1: 78.74,39.37 157.48,39.37 393.7,39.37 472.44,39.37 118.11,78.74 196.85,78.74 275.59,78.74 354.33,78.74 433.07,78.74 511.81,157.48 551.18,157.48 275.59,196.85 314.96,196.85 354.33,196.85 393.7,196.85 511.81,196.85 551.18,196.85 314.96,236.22 354.33,236.22 393.7,236.22 433.07,236.22 511.81,236.22 551.18,236.22 590.55,236.22 1311.02,251.97 1342.52,251.97 1287.4,279.53 960.63,303.15 988.19,303.15 1015.75,303.15 1043.31,303.15 1070.87,303.15 1098.43,303.15 -70.87,311.02 -39.37,311.02 988.19,334.65 1015.75,334.65 1043.31,334.65 1070.87,334.65 1098.43,334.65 -133.86,342.52 -102.36,342.52 -70.87,342.52 -39.37,342.52 373.62,358.66 787.8,393.7 988.19,405.51 1043.31,405.51 1070.87,405.51 1015.75,417.32 1098.43,417.32 805.12,418.11 988.19,433.07 1043.31,433.07 1070.87,433.07 1015.75,444.88 1098.43,444.88 988.19,460.63 -8.66,502.36 1102.36,511.81 1141.73,511.81 1181.1,511.81 1220.47,511.81 1259.84,511.81 1299.21,511.81 1338.58,511.81 578.74,523.62 -27.95,525.59 216.54,551.18 248.03,551.18 578.74,551.18 232.28,578.74 263.78,578.74 295.28,578.74 578.74,578.74 468.5,601.97 578.74,606.3 232.28,610.24 263.78,610.24 295.28,610.24 866.14,618.11 893.7,618.11 1129.92,622.05 1157.48,622.05 578.74,633.86 232.28,641.73 263.78,641.73 295.28,641.73 578.74,661.42 467.72,674.41 585.04,690.55 834.65,716.54 881.89,716.54 585.04,720.47 858.27,732.28 905.51,732.28 104.33,745.28 104.33,777.95 944.88,854.33 972.44,854.33 1000,854.33 1027.56,854.33 1055.12,854.33 411.81,874.41 441.73,874.41 471.65,874.41 1330.71,918.11 227.95,934.25 258.27,934.25 1330.71,945.67 1291.34,1110.24 990.55,1114.96 551.18,1122.05 275.59,1141.73 307.09,1141.73 511.81,1141.73 1291.34,1141.73 1291.34,1173.23 472.44,1181.1 826.77,1181.5 866.14,1181.5 732.28,1216.54 1094.49,1236.22 1122.05,1236.22 1149.61,1236.22 1177.17,1236.22 1204.72,1236.22 1232.28,1236.22 1263.78,1236.22 303.15,1299.21 440.94,1299.21 472.44,1299.21 1133.86,1303.15 1161.42,1303.15 1188.98,1303.15 1043.31,1307.09 1070.87,1307.09 1255.91,1307.09 287.4,1326.77 472.44,1338.58 0,1496.06 775.59,1515.75 39.37,1535.43 118.11,1535.43 629.92,1574.8 39.37,1614.17 118.11,1614.17 433.07,1614.17 0,1653.54 236.22,1653.54 314.96,1653.54 629.92,1653.54
  other v2: 70.87,248.03 102.36,248.03 133.86,248.03 165.35,248.03 196.85,248.03 51.57,260.24 210.63,272.83 157.48,287.4 711.02,308.66 110.24,326.77 94.49,338.58 39.37,350.39 -145.67,366.14 -122.05,366.14 -74.8,366.14 -47.24,366.14 98.43,370.08 122.05,370.08 37.01,414.96 -145.67,417.32 -122.05,417.32 -98.43,417.32 -74.8,417.32 -51.18,417.32 107.09,721.65 665.35,944.88 565.35,1178.74 549.21,1194.88
LCD_CLK: J7.18 U17.47 | length 164.7
  Top w6: v2(31.89,472.44) 34.65,472.44 59.84,497.64 59.84,533.07 66.14,539.37 U17.47@102.3,539.37
  Bottom w6: v2(31.89,472.44) 33.46,472.44 57.87,448.03 J7.18@67.6,448.03
LCD_CS: J7.15 U17.48 | length 162.1
  Top w6: U17.48@102.3,525.59 137.8,525.59 154.33,509.06 v2(209.06,509.06)
  Bottom w6: J7.15@182,483.47 201.97,483.46 209.06,490.55 v2(209.06,509.06)
LCD_D0: J7.16 U17.46 | length 163.5
  Top w6: v2(32.28,494.88) 44.88,507.48 44.88,549.21 48.82,553.15 U17.46@102.3,553.15
  Bottom w6: v2(32.28,494.88) 34.64,494.88 57.87,471.65 J7.16@67.6,471.65
LCD_D1: J7.17 U17.45 | length 166
  Top w6: U17.45@102.3,566.93 124.8,566.93 v2(142.52,549.21)
  Bottom w6: v2(142.52,549.21) 142.52,477.56 160.24,459.84 J7.17@182,459.84
LCD_D2: J7.20 U17.44 | length 253.5
  Top w6: v2(14.57,508.27) 19.68,508.27 31.1,519.68 31.1,555.12 56.69,580.71 U17.44@102.3,580.71
  Bottom w6: v2(14.57,508.27) 14.57,461.81 51.97,424.41 J7.20@67.6,424.41
LCD_D3: J7.19 U17.43 | length 217.9
  Top w6: U17.43@102.3,594.49 v2(125.59,594.49)
  Bottom w6: v2(125.59,594.49) 125.59,470.47 159.84,436.22 J7.19@182,436.22
LCD_RST: J7.14 U17.42 | length 203.1
  Top w6: v2(14.17,530.71) 14.17,555.51 66.93,608.27 U17.42@102.3,608.27
  Bottom w6: v2(14.17,530.71) 23.23,530.71 58.27,495.67 58.27,495.28 J7.14@67.6,495.28
LCD_TE: J7.21 U17.49 | length 241.5
  Top w6: U17.49@102.3,511.81 120.87,511.81 129.13,511.81 149.61,491.34 v2(225.98,491.34)
  Bottom w6: J7.21@182,412.6 203.15,412.6 209.84,419.29 209.84,468.11 225.98,484.25 v2(225.98,491.34)
LCD_VDD: C48.2 C50.2 FB3.2 J7.6 J7.8 J7.9 J7.10 | length 510.9
  Bottom w7.87: J7.10@67.6,542.52 94.88,542.52 103.15,550.79 103.15,610.24 111.42,618.5 132.68,618.5 148.03,603.15 148.03,569.68 149.21,568.5 163.39,554.33 J7.9@182,554.33
  Bottom w11.81: FB3.2@-103.15,590.24 -50.47,590.24 C50.2@-50,589.76 C48.2@-9.06,589.76 -8.72,589.76 9.06,589.76 ; J7.10@67.6,542.52 56.3,542.52 32.68,566.14 ; J7.8@67.6,566.14 32.68,566.14 ; J7.6@67.6,589.76 9.06,589.76 ; 9.06,589.76 32.68,566.14
LORA_BUSY: U3.4 U17.2 | length 1399
  Top w6: U17.2@370.92,498.03 393.31,498.03 400,491.34 400,440.16 459.05,381.1 641.73,381.1 720.08,459.45 720.08,824.41 805.12,909.45 v2(887.8,909.45) ; U3.4@677.17,1104.72 716.93,1104.72 776.38,1045.28 v2(887.8,1045.28)
  Bottom w6: v2(887.8,909.45) v2(887.8,1045.28)
LORA_CS: U3.10 U17.4 | length 1525
  Top w6: U17.4@370.92,525.59 417.72,525.59 425.2,518.11 425.2,450.39 468.9,406.69 632.28,406.69 693.31,467.72 693.31,845.67 790.94,943.31 1103.94,943.31 1115.35,954.72 1115.35,1101.97 1057.48,1159.84 U3.10@1043.31,1159.84
LORA_EN: R59.2 U17.7 | length 1583.3
  Top w6: U17.7@370.92,566.93 416.93,566.93 450.39,533.46 450.39,462.21 481.5,431.1 620.87,431.1 667.72,477.95 667.72,868.11 777.17,977.56 v2(926.77,977.56) ; v2(926.77,926.38) 1275.58,926.38 R59.2@1328.28,979.07
  Bottom w6: v2(926.77,926.38) v2(926.77,977.56)
LORA_IRQ: U3.5 U17.3 | length 1326.2
  Top w6: U17.3@370.92,511.81 405.91,511.81 412.6,505.12 412.6,445.28 463.78,394.09 637.01,394.09 706.69,463.78 706.69,835.04 798.03,926.38 v2(870.87,926.38) ; U3.5@677.17,1049.61 745.67,1049.61 766.93,1028.35 v2(870.87,1028.35)
  Bottom w6: v2(870.87,926.38) v2(870.87,1028.35)